# Altium PCB EP600_M_V1.7.2.PcbDoc
Units mil, origin at the board's own origin, x right, y up, seen from the top; angles counter-clockwise.
Board outline 8950 x 5110 mil, 2 copper layers (Top Layer, Bottom Layer); 84 components, 78 nets, 275 pads, 57 vias.
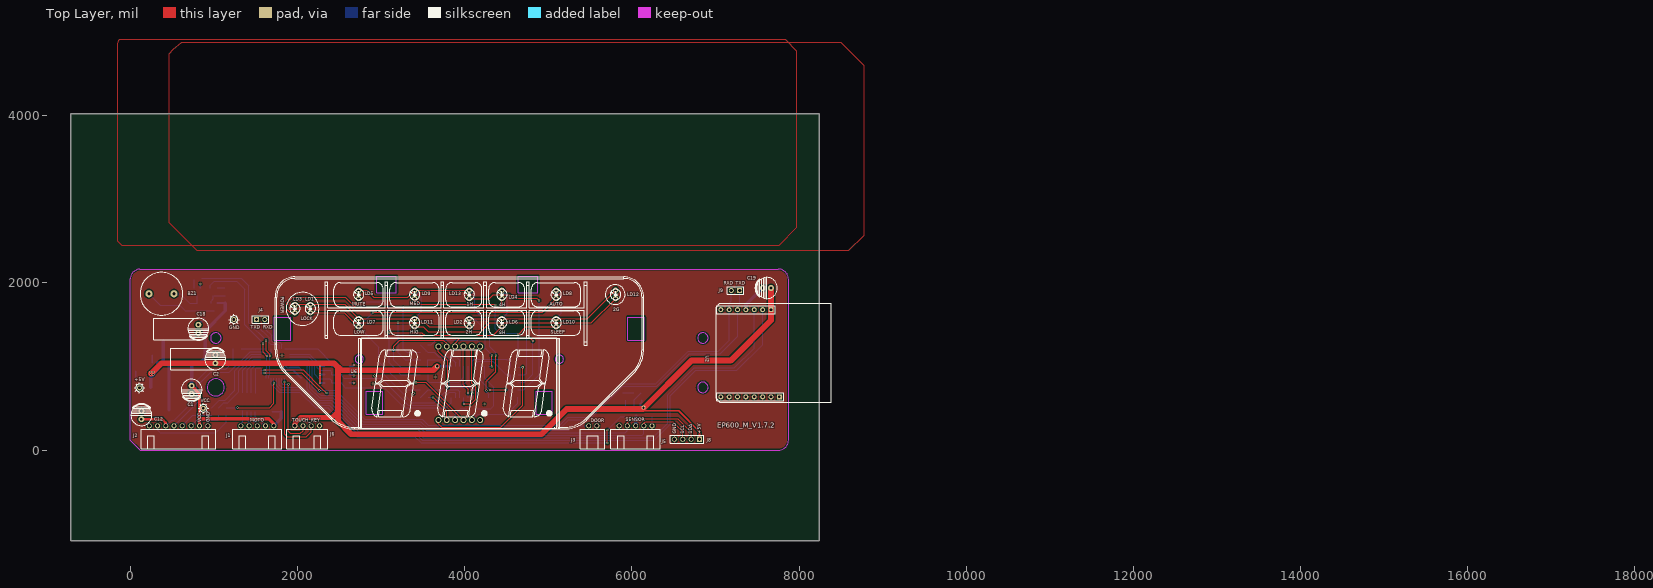
[diagram p0: Top Layer view]
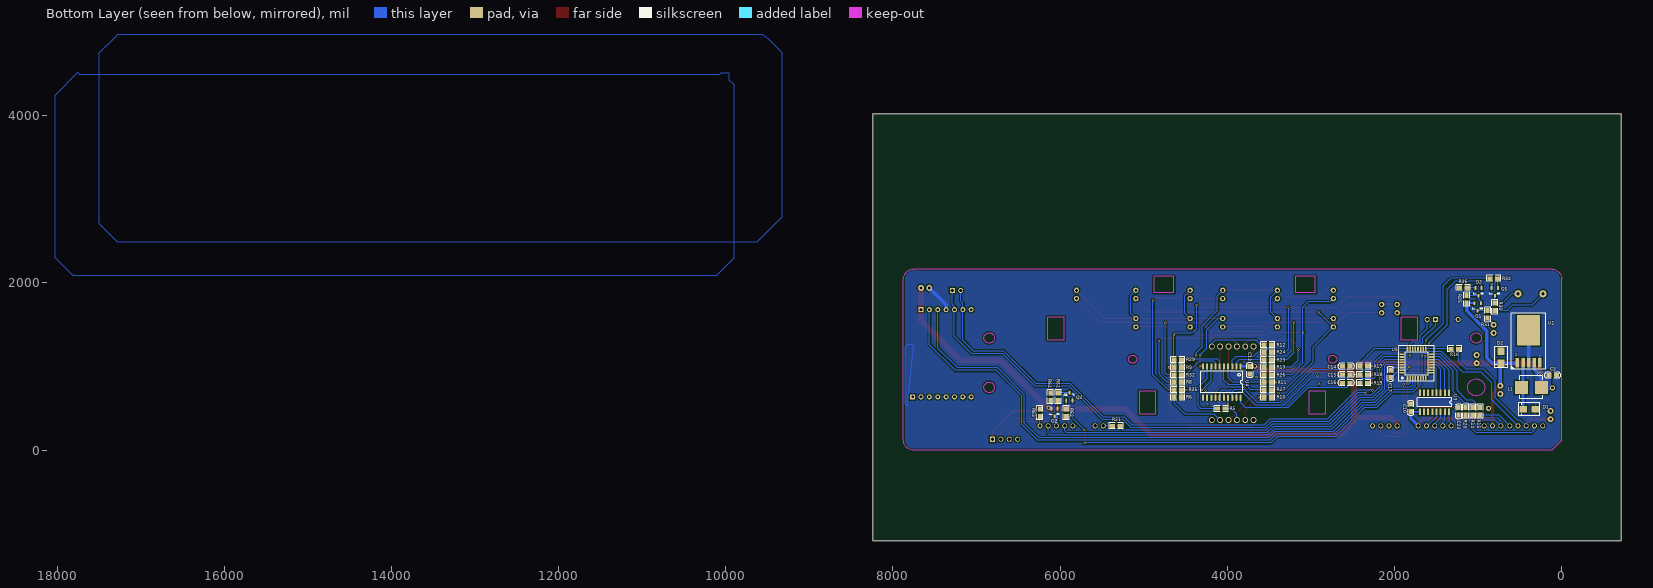
[diagram p1: Bottom Layer view, seen from below]

## Layer stack, top to bottom
Top Layer: signal copper 1.4
Dielectric: dielectric 12.6, FR-4, Dk 4.8
Bottom Layer: signal copper 1.4

## Board outline
-575,4025 8240,4025 8240,-1085 -710,-1085 -710,4025

## Design rules (kind name [scope] priority, off if disabled: settings)
Clearance [All] p1: gap=7
ComponentClearance [All] p1: gap=5 collisioncheckmode=3 verticalgap=10
PlaneConnect [All] p1: planeconnectstyle=Direct reliefexpansion=20 reliefentries=4 reliefconductorwidth=10 reliefairgap=10
PolygonConnect PolygonConnect_1 [InNet('+4V')] p1: connectstyle=Direct reliefconductorwidth=10 reliefentries=4 polygonreliefangle="90 Angle"
PolygonConnect [All] p2: connectstyle=Relief reliefconductorwidth=15 reliefentries=4 polygonreliefangle="90 Angle"
RoutingCorners [All] p1: cornerstyle=Round minsetback=100 maxsetback=100
RoutingVias [All] p1: holewidth=12 width=25 viastyle="Through Hole" minholewidth=12 minwidth=25 maxholewidth=28 maxwidth=50
SolderMaskExpansion [All] p1: expansion=4
TestPointUsage [All] p1: valid=0 allowmultiple=FALSE
Testpoint [All] p1: side=15 testpointundercomponent=TRUE minsize=40 maxsize=100 preferedsize=60 minholesize=0 maxholesize=40 preferedholesize=32 testpointgrid=1 style=1023 order=0123456789
Width [All] p1: maxlimit=100 minlimit=10 preferedwidth=10 minimp=50.000000 maximp=50.000000 favimp=50.000000
16 further rules are at their usual default settings.

## Classes and differential pairs
component class U_02-MCU: BZ1 C10 C12 C13 C14 C15 C16 C17 C18 C19 C23 J1 J2 J3 J4 J5 J6 J8 J9 LD1 LD2 LD3 LD4 LD5 LD6 LD7 LD8 LD9 LD10 LD11 LD12 LD13 Q1 Q2 Q3 Q4 Q5 R5 R6 R8 R9 R10 R11 R12 R13 R14 R15 R16 R17 R18 R19 R20 R21 R23 R24 R25 R26 R27 R29 R30 R31 R32 R34 R35 R36 R61 R62 R63 R64 U2 U3 U4 U5 U6
component class U_01-POWER: 4V +5V C1 C2 C3 D1 D2 GND L1 L2 U1 VCC

## Components (designator, comment, footprint, x,y, rotation, side; value= is the part's Value field where it differs from the comment)
+5V "T POINT A" TP_60_30 110,745 r0 top
BZ1 "BUZZER" BUZ1 223.43,1870 r0 top
C1 "100uF/35V" CE06150 734,770 r0 top
C2 "220uF/16V" "CE06150 - W"#1 1018,1040 r180 top
C3 "1uF" 0805_C 65,895 r0 bottom
C10 "0.1uF" 0805_C 1805,459.57 r90 bottom
C12 "100uF/16V" CE06150 133.35,370 r180 top
C13 "0.1uF" 0805_C 3731.07,1002.17 r270 bottom
C14 "100PF" 0805_C 2532.8,1004.57 r0 bottom
C15 "100PF" 0805_C 2532.8,904.57 r0 bottom
C16 "100PF" 0805_C 2532.8,804.57 r0 bottom
C17 "0.1uF" 0805_C 2049.17,866.65 r90 bottom
C18 "47uF/25V" "CE06150 - W"#2 815,1500 r180 top
C19 "220uF/16V" CE06150 7664.35,1939.37 r270 top
C23 "1nF" 0805_C 1234.35,419 r90 bottom
D1 "1N5824" SMB-DO-214AA_DIOM4436X24N 315,490 r0 bottom
D2 "SMBJ20A" SMB-DO-214AA_DIOM4436X24N 725,1184 r270 bottom
GND "T POINT A" TP_60_30 1240,1562.18 r0 top
J1 "CON5" XH2.54-5PW 1322.8,290 r0 top
J2 "CON8" XH2.54-8PW 227.8,290 r0 top
J3 "CON2" XH2.54-2PW 5483.35,290 r0 top
J4 "CON2" SIP2 1509.4,1562.18 r0 top
J5 "CON5" XH2.54-5PW 5848.35,290 r0 top
J6 "CON4" XH2.54-4PW 1967.8,290 r0 top
J8 "CON4" SIP4 6809.13,130 r180 top
J9 "CON2" SIP2 7289.35,1909.05 r180 top
L1 "33uH/1A" SMD_S7-7-5 480,750 r180 bottom
LD1 "WHITE" LED1 2153.54,1692.91 r180 top (schematic designator LD5)
LD2 "WHITE" LED1 4055.12,1523.62 r180 top (schematic designator LD13)
LD3 "WHITE" LED1 1968.5,1692.91 r180 top (schematic designator LD6)
LD4 "WHITE" LED1 4444.88,1862.2 r180 top (schematic designator LD10)
LD5 "WHITE" LED1 2732.28,1862.2 r180 top (schematic designator LD1)
LD6 "WHITE" LED1 4444.88,1523.62 r180 top (schematic designator LD11)
LD7 "WHITE" LED1 2732.28,1523.62 r180 top locked
LD8 "WHITE" LED1 5094.49,1862.2 r180 top (schematic designator LD12)
LD9 "WHITE" LED1 3401.57,1862.2 r180 top locked (schematic designator LD3)
LD10 "WHITE" LED1 5094.49,1523.62 r180 top (schematic designator LD8)
LD11 "WHITE" LED1 3401.57,1523.62 r180 top (schematic designator LD2)
LD12 "WHITE" LED1 5805,1862.2 r180 top
LD13 "WHITE" LED1 4055.12,1862.2 r180 top (schematic designator LD4)
Q1 "2N3906" SOT23 967.99,1759.14 r270 bottom
Q2 "S8550" SOT23 6029.65,495 r270 bottom
Q3 "2N3904" SOT23 957.99,1939.14 r270 bottom
Q4 "2N3904" SOT23 5927.05,594.13 r90 bottom
Q5 "2N3904" SOT23 762.99,1939.13 r270 bottom
R5 "220" 0805_R 4116.68,496.57 r180 bottom
R6 "220" 0805_R 4547,631.57 r0 bottom
R8 "220" 0805_R 4547,811.57 r0 bottom
R9 "220" 0805_R 4549.8,991.57 r0 bottom
R10 "220" 0805_R 3471.68,631.57 r0 bottom
R11 "220" 0805_R 3561.68,811.57 r180 bottom
R12 "220" 0805_R 3470.07,1261.57 r0 bottom
R13 "220" 0805_R 3561.07,991.57 r180 bottom
R14 "330" 0805_R 1061,508.57 r270 bottom
R15 "330" 0805_R 976,508.57 r270 bottom
R16 "330" 0805_R 1324.57,1210.59 r180 bottom
R17 "10K" 0805_R 2322.8,1004.57 r0 bottom
R18 "10K" 0805_R 2322.8,904.57 r0 bottom
R19 "10K" 0805_R 2322.8,804.57 r0 bottom
R20 "1k" 0805_R 1149.35,509 r270 bottom
R21 "1K" 0805_R 5283.35,290 r0 bottom
R23 "220" 0805_R 3562.07,1081.57 r180 bottom
R24 "220" 0805_R 3560.07,1171.57 r180 bottom
R25 "4.7K" 0805_R 1137.99,1759.13 r90 bottom
R26 "220" 0805_R 3561.68,901.57 r180 bottom
R27 "220" 0805_R 3561.68,721.57 r180 bottom
R29 "220" 0805_R 4549.8,1081.57 r0 bottom
R30 "4.7K" 0805_R 800.99,1668.27 r90 bottom
R31 "100" 0805_R 885.99,1578.27 r90 bottom
R32 "220" 0805_R 4549.8,901.57 r0 bottom
R34 "4.7K" 0805_R 766.5,2054.57 r0 bottom
R35 "220" 0805_R 4547,721.57 r0 bottom
R36 "4.7K" 0805_R 1221.5,1944.57 r180 bottom
R61 "4.7K" 0805_R 6022.05,684.13 r270 bottom
R62 "4.7K" 0805_R 5927.05,402.18 r90 bottom
R63 "0R" 0805_R 6242.05,402.18 r90 bottom
R64 "2K" 0805_R 6117.05,594.13 r90 bottom
U1 "LM2596S-5.0" TO-263-5 530,1045 r180 bottom
U2 "M26_MODULE" M26-MODULE 7064.35,1680.05 r270 top locked
U3 "ULN2004" SOP16 1347.8,684.57 r270 bottom
U4 "TM1620" SOP20 4066.07,814.17 r270 bottom
U5 "OB39R32T1W32VP" LQFP32 1734.78,1035.39 r180 bottom
U6 "SP410801K" LED08031 3936.07,799.21 r0 top locked
VCC "T POINT A" TP_60_30 875,500 r0 top

## Footprints (in the part's own frame and the unit in brackets; to place one, negate y for a bottom-side part, rotate by r counter-clockwise, add the part's x,y. Pads: shape width x height; smd on the part's side, far side on the other; paste and mask are expansions set on the pad)
0805_C [mil]
  rect 60x50 smd: 1(0,0) 2(90,0)
  silkscreen extent -48,-35 139,35
0805_R [mil]
  rect 60x50 smd: 1(0,0) 2(90,0)
  silkscreen extent -40,-35 130,35
BUZ1 [mm]
  round 2.2 hole 1: 1(0,0) 2(7.6,0)
  silkscreen extent -2.7,-6.5 10.3,6.5
CE06150 [mm]
  round 1.8 hole 0.8: 1(0,0) 2(0,-2.5)
  silkscreen extent -3.2,-4.65 3.2,1.95
"CE06150 - W"#1 [mm]
  round 1.8 hole 0.8: 1(0,0) 2(0,-2.5)
  silkscreen extent -3.2,-4.65 13.5,1.96
"CE06150 - W"#2 [mm]
  round 1.8 hole 0.8: 1(0,0) 2(0,2.5)
  silkscreen extent -3.2,-1.96 13.5,4.65
LED1 [mil]
  round 63 hole 35.43: A(0,50) K(0,-50)
  silkscreen extent -63,-64 63,62
LED08031 [mm]
  round 1.8 hole 1.2: 1(-6.35,-11.175) 2(-3.81,-11.175) 3(-1.27,-11.175) 4(1.27,-11.175) 5(3.81,-11.175) 6(6.35,-11.175) 7(6.35,11.175) 8(3.81,11.175) 9(1.27,11.175) 10(-1.27,11.175) 11(-3.81,11.175) 12(-6.35,11.175)
  silkscreen extent -29.65,-13.72 29.65,13.78
LQFP32 [mm]
  oval 0.5x1.5 smd: 1(-2.8,-4.45) 2(-2,-4.45) 3(-1.2,-4.45) 4(-0.4,-4.45) 5(0.4,-4.45) 6(1.2,-4.45) 7(2,-4.45) 8(2.8,-4.45) 17(2.8,4.45) 18(2,4.45) 19(1.2,4.45) 20(0.4,4.45) 21(-0.4,4.45) 22(-1.2,4.45) 23(-2,4.45) 24(-2.8,4.45)
  oval 1.5x0.5 smd: 9(4.45,-2.8) 10(4.45,-2) 11(4.45,-1.2) 12(4.45,-0.4) 13(4.45,0.4) 14(4.45,1.2) 15(4.45,2) 16(4.45,2.8) 25(-4.45,2.8) 26(-4.45,2) 27(-4.45,1.2) 28(-4.45,0.4) 29(-4.45,-0.4) 30(-4.45,-1.2) 31(-4.45,-2) 32(-4.45,-2.8)
  silkscreen extent -5.4,-5.4 5.4,5.4
M26-MODULE [mil]
  rect 60x60 hole 32: 1(0,600) 15(1043.31,700)
  round 60 hole 32: 2(0,500) 3(0,400) 4(0,300) 5(0,200) 6(0,100) 7(0,0) 8(1043.31,0) 9(1043.31,100) 10(1043.31,200) 11(1043.31,300) 12(1043.31,400) 13(1043.31,500) 14(1043.31,600)
  silkscreen extent -76,-58 1105,1320
SIP2 [mil]
  rect 60x60 hole 40: 1(0,0)
  round 60 hole 40: 2(100,0)
  silkscreen extent -50,-47 150,47
SIP4 [mil]
  rect 60x60 hole 40: 1(0,0)
  round 60 hole 40: 2(100,0) 3(200,0) 4(300,0)
  silkscreen extent -50,-47 350,47
SMB-DO-214AA_DIOM4436X24N [mm]
  rect 2.25x2.05 smd: 1(0,0) 2(3.65,0)
  silkscreen extent -1.35,-2 5,2, body extent -0.52,-1.97 4.17,1.97, height 2.44
SMD_S7-7-5 [mm]
  rect 4x4 smd: 1(0,0) 2(6,0)
  silkscreen extent -0.5,-3.5 6.5,3.5, body extent -0.5,-3.5 6.5,3.5, height 5
SOP16 [mil]
  oval 76x24 smd: 1(0,0)
  rect 76x24 smd: 2(0,-50) 3(0,-100) 4(0,-150) 5(0,-200) 6(0,-250) 7(0,-300) 8(0,-350) 9(225,-350) 10(225,-300) 11(225,-250) 12(225,-200) 13(225,-150) 14(225,-100) 15(225,-50) 16(225,0)
  silkscreen extent 60,-380 165,30
SOP20 [mil]
  oval 74x24 smd: 1(-188,225) 2(-188,175) 3(-188,125) 4(-188,75) 5(-188,25) 6(-188,-25) 7(-188,-75) 8(-188,-125) 9(-188,-175) 10(-188,-225) 11(188,-225) 12(188,-175) 13(188,-125) 14(188,-75) 15(188,-25) 16(188,25) 17(188,75) 18(188,125) 19(188,175) 20(188,225)
  silkscreen extent -130,-250 130,250
SOT23 [mm]
  rect 1.092x0.6 smd: 1(0,0) 2(0,-1.9) 3(2.308,-0.95)
  silkscreen extent 1.41,-2.45 1.85,0.55, body extent 0.45,-2.45 1.85,0.55, height 1.1
TO-263-5 [mm]
  rect 1.07x3 smd: 1(0,0) 2(1.7,0) 3(3.4,0) 4(5.1,0) 5(6.8,0)
  rect 7x9.4 smd: 6(3.41,9.878)
  silkscreen extent -1.8,-2 8.6,15, body extent 0,0 6.8,12.6, height 4.5
TP_60_30 [mil]
  round 60 hole 31.5: 1(0,0)
  silkscreen extent -64,-63 62,63
XH2.54-2PW [mil]
  round 60 hole 40: 1(0,0) 2(98.43,0)
  silkscreen extent -98,-276 192,-40, body extent -101,-276 192,-40, height 236
XH2.54-4PW [mil]
  round 60 hole 40: 1(0,0) 2(98.43,0) 3(196.85,0) 4(295.28,0)
  silkscreen extent -98,-276 392,-40, body extent -101,-276 392,-40, height 236
XH2.54-5PW [mil]
  round 60 hole 40: 1(0,0) 2(98.43,0) 3(196.85,0) 4(295.28,0) 5(393.7,0)
  silkscreen extent -98,-276 492,-40, body extent -101,-275 494,-40, height 236
XH2.54-8PW [mil]
  round 60 hole 40: 1(0,0) 2(98.43,0) 3(196.85,0) 4(295.28,0) 5(393.7,0) 6(500,0) 7(600,0) 8(700,0)
  silkscreen extent -98,-276 792,-40, body extent -101,-276 792,-40, height 236

## Part data
BZ1: "Buzzer"
C1 C2 C14 C18 C19: library part ECAP, "E-CAP"
C3: library part "Cap Semi", "Capacitor"
C10 C12 C13: library part CAP, "CAP"
C15 C16 C17: library part "Cap Semi_1", "Capacitor"
C23: library part Cap, "Capacitor"
D1: library part "DIODE SCHOTTKY"
D2: library part "D Zener", "TVS"
J1 J6: library part CON6, "Connector"
J2: library part CON2, "Connector"
J3 J4 J9: "Connector"
J5: library part "Header 4", "Header, 4-Pin"
L1: library part Inductor, "Inductor"
LD1 LD2 LD3 LD4 LD5 LD6 LD7 LD8 LD9 LD10 LD11 LD12 LD13: library part LED, "LED"
Q1 Q4 Q5: library part NPN
Q2 Q3: library part PNP
R5 R6 R8 R9 R10 R11 R12 R13 R14 R15 R19 R20 R21 R23 R24 R25 R26 R27 R29 R30 R31 R32 R34 R35 R36: library part R0.25W, "RESISTOR"
R16 R17 R18 R61 R62 R63 R64: library part RES1
U1: library part LM2596T-5.0
U2: library part M26-Module
U3: library part LM78M05

## Via types
v1: diameter 25, hole 12, Top Layer to Bottom Layer, tented both sides, 55 vias
v2: diameter 50, hole 28, Top Layer to Bottom Layer, tented both sides, 2 vias

## Nets (pads, with @x,y where several pads share a name; then routed paths per layer and width w, separated by ;. In a path a pad name is that pad's centre, name@x,y a point inside that pad or via, vN(x,y) a via of type N, cw(c..) or ccw(c..) an arc to the next point about the centre after c; other vN are vias at no path point)
+5V: +5V.1 C2.1 C3.2 C13.1 C17.1 C19.1 J6.1 J8.1 L1.2 Q2.2 R17.1 R18.1 R19.1 R64.1 U1.4 U2.1 U4.1 U5.31 | length 13117.3
  Top Layer w20: v1(1824.17,995.39) 1824.17,1025.39 ; 6120,470 6560,470 6808.35,221.65 6808.35,130.79 J8.1
  Top Layer w25: v1(2267.8,804.57) 2267.8,985.55
  Top Layer w60: J6.1 1967.8,320.07 2035.99,388.27 2410.99,388.27 2486.14,463.41
  Top Layer w70: 249.57,915.59 373.98,1040 2438.06,1040 2522.49,955.57 3624.46,955.57 v2(3671.07,1002.18) ; 2486.14,976.35 2486.14,348.27 2644.21,190.2 4918.55,190.2 5220.92,492.57 6133.78,492.57 6711.78,1070.57 7181.78,1070.57 7664.35,1553.14 C19.1
  Bottom Layer w20: v1(1824.17,995.39) 1862.91,956.65 1950.02,956.65 2040.02,866.66 C17.1 ; Q2.2 6104.45,559.58 6117.05,572.18 R64.1
  Bottom Layer w25: v1(2267.8,804.57) R19.1 ; v1(2267.8,904.57) R18.1 ; v1(2267.8,1004.57) R17.1
  Bottom Layer w30: v2(3671.07,1002.18) U4.1@3831.07,1002.18
  Bottom Layer w40: L1.2 243.78,873.78 329.21,959.21 U1.4 ; 6116.78,495.57 6125.78,495.57 v2(6138.78,508.57)
  other v1: 239.57,905.59 274.57,905.59 239.57,935.59 274.57,935.59
CLK: C15.1 R18.2 U4.19 U5.25 | length 2460.6
  Bottom Layer w10: U5.25 2146.43,1145.63 2166.49,1125.57 ; 2166.34,1125.42 2237.49,1054.27 2237.49,986.74 2270.61,953.62 2391.49,953.62 2412.8,932.31 R18.2 C15.1 2532.8,881.82 2554.61,860 2999.54,860 3324.97,534.57 3658.8,534.57 3813.8,689.57 3878.8,689.57 3891.07,677.29 U4.19 ; 2495.99,908.62 C15.1@2532.8,908.62
DIO: C14.1 R17.2 U4.18 U5.24 | length 2572.2
  Bottom Layer w10: U5.24 2243.64,1210.59 2412.8,1041.43 R17.2 ; 2412.8,1030.55 R17.2 ; U4.18 3941.07,696.29 3917.8,719.57 3790.8,719.57 3635.8,564.57 3372.39,564.57 2978.34,958.62 2549.73,958.62 2532.8,975.55 C14.1 R17.2
FG: C23.2 R20.1 U5.5 | length 890.6
  Top Layer w10: v1(1284.35,509) 1667.35,509 1719.03,560.68 v1(1719.03,800.2)
  Bottom Layer w10: R20.1 v1(1284.35,509) ; v1(1719.03,800.2) U5.5
GND: C1.2 C2.2 C3.1 C10.2 C12.2 C13.2 C14.2 C15.2 C16.2 C17.2 C18.2 C19.2 C23.1 D1.1 D2.1 GND.1 J2.8 J3.2 J5.1 J6.4 J8.4 Q4.2 Q5.2 R36.1 R63.2 U1.3 U1.5 U1.6 U2.4 U2.7 U2.8 U2.9 U2.10 U2.11 U2.12 U2.13 U2.14 U2.15 U3.8 U4.12 U4.15 U5.30 | length 1325.1
  Bottom Layer w10: 1821,1045 1877.85,988.15 U5.30
  Bottom Layer w20: 65,845 65,945 ; U1.5 262.28,1134.68 ; Q5.2 v1(837.8,1989.13) ; U5.30 2017.68,988.15 C17.2 ; C16.2 v1(2674.57,804.57) ; C15.2 2661.57,904.57 v1(2674.57,891.57) ; C14.2 2660.57,1004.57 v1(2674.57,1018.57) ; U4.15 v1(4091.07,680.96)
  Bottom Layer w40: U1.3 U1.6@396.14,1301.14 ; U2.4 7364.35,1737.79 C19.2 ; C19.2@7574.47,1939.37 C19.2@7574.92,1939.37
  other v1: 4235,550 3390,680 2903.35,795 3650,875 2920.49,889.57 1814.98,1132.13
GRID1: U4.17 U6.8 | length 892.6
  Top Layer w10: v1(3991.07,552.17) 4079.1,552.17 4135.19,608.27 4135.19,753.27 4086.07,802.39 U6.8
  Bottom Layer w10: v1(3991.07,552.17) U4.17
GRID2: U4.16 U6.9 | length 635.8
  Top Layer w10: U6.9 3986.07,783.27 4041.07,728.27 v1(4041.07,680.96)
  Bottom Layer w10: U4.16 v1(4041.07,680.96)
GRID3: U4.14 U6.12 | length 973.5
  Top Layer w10: U6.12 3686.07,1177.39 3795.8,1067.67 v1(3795.8,749.57)
  Bottom Layer w10: v1(3795.8,749.57) 4088.67,749.57 4141.68,696.57 4141.68,626.78 U4.14
GRID5: LD1.K LD3.K LD5.K LD7.K LD9.K LD11.K LD13.K U4.11 | length 4780.5
  Top Layer w10: LD3.K 2562.99,1742.91 LD7.K LD11.K ; LD5.K 2829.5,1912.2 2914.13,1827.57 3316.94,1827.57 LD9.K LD13.K ; v1(4259,715.44) 4259,825.44 4374,940.44 v1(4374,1130.44)
  Bottom Layer w10: LD11.K 3482.09,1654.13 3482.09,1831.69 LD9.K ; LD13.K 4119,1848.33 4119,1670.44 4299,1490.44 4299,1237.17 4374,1162.17 v1(4374,1130.44) ; v1(4259,715.44) 4259,700.44 4291.07,668.36 U4.11
GRID6: LD2.K LD4.K LD6.K LD8.K LD10.K LD12.K U4.10 | length 3427.4
  Top Layer w10: LD2.K LD10.K@5096.85,1573.62 ; v1(4326.07,1002.17) v1(4326.07,1130.44) ; LD10.K 5466.42,1573.62 LD12.K
  Bottom Layer w10: LD2.K 4115.81,1573.62 4249,1440.44 4249,1219.25 4326.07,1142.17 v1(4326.07,1130.44) ; U4.10 v1(4326.07,1002.17) ; LD6.K 4507.8,1636.54 4507.8,1849.29 LD4.K ; LD10.K 5156.5,1635.63 5156.5,1850.2 LD8.K
IIC_SCL: J6.3 U5.1 | length 1100.8
  Top Layer w10: v1(1845.02,815.2) 1845.02,189.24 1875.99,158.27 2105.99,158.27 2164.65,216.92 J6.3
  Bottom Layer w10: v1(1845.02,815.2) U5.1
IIC_SDA: J6.2 U5.2 | length 958.2
  Top Layer w10: v1(1890.8,787.57) 1890.8,225.96 1913.49,203.27 2035.99,203.27 2066.22,233.5 J6.2
  Bottom Layer w10: U5.2 1813.52,799.85 1825.8,787.57 v1(1890.8,787.57)
ION: R15.1 U5.16 | length 986
  Bottom Layer w10: R15.1 1062.74,595.31 1133.66,595.31 1252.57,714.23 1252.57,950.73 1335.46,1033.61 1447.48,1145.63 U5.16
MOT_1: U3.1 U5.14 | length 536.2
  Bottom Layer w10: U3.1 1347.8,956.87 1473.57,1082.64 U5.14
MOT_2: U3.2 U5.13 | length 476.1
  Bottom Layer w10: U3.2 1397.8,961.87 1487.07,1051.14 U5.13
MOT_3: U3.3 U5.12 | length 416.2
  Bottom Layer w10: U3.3 1447.8,967.32 1469.18,988.7 1500.12,1019.65 U5.12
MOT_4: U3.4 U5.11 | length 356.4
  Bottom Layer w10: U3.4 1498.35,685.12 1498.35,973.33 1513.17,988.15 U5.11
NetBZ1_1: BZ1.1 Q1.3 R30.1 R31.2 | length 866.8
  Bottom Layer w10: BZ1.1 357.83,1735.59 589.57,1735.59 656.89,1668.27 Q1.3 Q1.3@1004.53,1669.13
NetBZ1_2: BZ1.2 Q5.3 R30.2 | length 415.2
  Bottom Layer w10: BZ1.2 599.26,1870 710.39,1758.87 R30.2@800.39,1758.87 ; R30.2@800.39,1758.27 R30.2 R30.2@800.39,1758.87 ; Q5.3@800.39,1844.13 Q5.3@800.99,1844.13 ; Q5.3 R30.2@800.39,1758.87
NetC12_1: C12.1 J2.3 R16.2 | length 1745.9
  Top Layer w30: C12.1 380,370 424.65,325.35 J2.3
  Bottom Layer w10: J2.3 494.65,360 528.35,360 795,626.65 795,830 930,965 1143.35,965 1234.57,1056.22 R16.2
NetC18_1: C18.1 R31.1 | length 110.8
  Bottom Layer w20: C18.1 885.99,1570.99 R31.1 R31.1@882.84,1578.27
NetD1_2: D1.2 L1.1 U1.2 | length 560.6
  Bottom Layer w40: D1.2@463.07,484.37 U1.2
NetJ1_1: J1.1 U3.16 | length 187.9
  Bottom Layer w10: J1.1 1322.8,318.27 1345.99,341.46 U3.16@1345.99,468.27
NetJ1_2: J1.2 U3.15 | length 179.3
  Bottom Layer w10: U3.15 1397.8,356.46 1421.22,333.04 J1.2
NetJ1_3: J1.3 U3.14 | length 199.3
  Bottom Layer w10: U3.14 1447.8,386.46 1519.65,314.61 J1.3
NetJ1_4: J1.4 U3.13 | length 224.5
  Bottom Layer w10: U3.13 1497.8,401.46 1609.26,290 J1.4
NetJ2_2: J2.2 R20.2 | length 1027.3
  Bottom Layer w10: J2.2 326.22,237.87 359.1,205 1020.35,205 1149.35,334 R20.2
NetJ2_5: J2.5 R15.2 | length 407.8
  Bottom Layer w10: J2.5 750.07,418.57 R15.2
NetJ2_6: J2.6 R14.2 | length 413.9
  Bottom Layer w10: J2.6 792.8,355 1044.35,355 1061,371.65 R14.2
NetJ3_1: J3.1 R21.2 | length 110
  Bottom Layer w10: R21.2 J3.1
NetJ5_3: J5.3 Q2.3 | length 117.8
  Bottom Layer w40: J5.3 6045.2,395.2 6054.14,404.13
NetJ5_5: J5.5 R63.1 | length 112.2
  Bottom Layer w10: J5.5 R63.1
NetLD1_A: LD1.A LD2.A R23.2 | length 2634.7
  Top Layer w10: LD1.A 2559.45,1642.91 2677.8,1524.57 3527.8,1524.57 3578.74,1473.62 LD2.A
  Bottom Layer w10: v1(3202.8,1524.57) 3202.8,1165.67 3286.9,1081.57 R23.2
NetLD3_A: LD3.A LD4.A R24.2 | length 3641.2
  Top Layer w10: LD3.A 1912.33,1642.91 1872.07,1683.17 1872.07,1757.17 1941.07,1826.17 2573.07,1826.17 2695.07,1704.17 4414.07,1704.17 4444.88,1734.99 LD4.A
  Bottom Layer w10: v1(3266.07,1704.17) 3266.07,1213.27 3307.77,1171.57 R24.2
NetLD5_A: LD5.A LD6.A R26.2 | length 2913.7
  Top Layer w10: v1(3095.07,1406.57) 3484.68,1406.57 3519.68,1371.57 4342.83,1371.57 LD6.A
  Bottom Layer w10: LD5.A 2771.92,1772.57 3034.13,1772.57 3095.07,1711.63 3095.07,1044.93 3238.43,901.57 R26.2
NetLD7_A: LD7.A LD8.A R27.2 | length 3653.5
  Top Layer w10: v1(2905.07,1646.57) 4928.85,1646.57 LD8.A
  Bottom Layer w10: v1@2905.15,1646.49 LD7.A 2975.07,1230.84 2975.07,1059.93 3313.43,721.57 R27.2
NetLD9_A: LD9.A LD10.A R29.2 | length 2375.2
  Top Layer w10: LD9.A 3467.21,1746.57 4356.68,1746.57 v1(4366.68,1736.57) ; v1(4639.8,1380.57) 4732.85,1473.62 LD10.A
  Bottom Layer w10: v1(4366.68,1736.57) 4366.68,1453.2 4407.85,1412.02 4423.54,1396.34 4624.02,1396.34 v1(4639.8,1380.57) R29.2
NetLD11_A: LD11.A LD12.A R32.2 | length 3303.1
  Top Layer w10: LD11.A 3504.62,1473.62 3561.68,1416.57 4191.68,1416.57 4298.68,1523.57 5516.36,1523.57 LD12.A
  Bottom Layer w10: R32.2 4721.68,901.57 4741.68,921.57 v1(4741.68,1523.57)
NetLD13_A: LD13.A R35.2 | length 2100.6
  Top Layer w10: LD13.A 4291.31,1812.2 4340.68,1861.57 4537.68,1861.57 4581.68,1817.57 4863.68,1817.57 v1(4889.68,1791.57)
  Bottom Layer w10: R35.2 4708.67,721.57 4889.68,902.57 v1(4889.68,1791.57)
NetQ1_1: Q1.1 Q3.3 R25.2 | length 233.4
  Bottom Layer w10: Q1.1 967.99,1782.99 995.39,1810.39 Q3.3 ; Q3.3@1005.39,1848.27 1006.26,1849.13 R25.2
NetQ2_1: Q2.1 R61.2 R64.2 | length 233.8
  Bottom Layer w10: R61.2 R64.2@6112.05,684.13 ; Q2.1 R61.2@6029.65,601.54
NetQ3_2: Q3.2 R36.2 | length 93.7
  Bottom Layer w10: Q3.2@1037.8,1944.57 R36.2
NetQ4_1: Q4.1 R62.2 | length 102
  Bottom Layer w10: R62.2 Q4.1
NetQ4_3: Q4.3 R61.1 | length 132.8
  Bottom Layer w10: Q4.3 5890.51,684.13 R61.1
NetQ5_1: Q5.1 R34.1 | length 100
  Bottom Layer w10: Q5.1 R34.1@762.99,2039.13
NetR5_2: R5.2 U6.3 | length 273.2
  Bottom Layer w10: U6.3@3886.07,392.96 U6.3 3886.07,430.96 3951.68,496.57 R5.2
NetR6_2: R6.2 U6.5 | length 703.7
  Bottom Layer w10: U6.5 4158.39,431.57 4505.3,431.57 4637,563.27 R6.2
NetR8_2: R8.2 U6.10 | length 1623.5
  Top Layer w10: U6.10 3886.07,1279.15 3942.49,1335.57 4786.68,1335.57 v1(4816.68,1305.57)
  Bottom Layer w10: R8.2 4720.07,811.57 4816.68,908.17 v1(4816.68,1305.57)
NetR9_2: R9.2 U6.1 | length 1685.3
  Top Layer w10: U6.1 3686.07,317.17 3727.68,275.57 4432.68,275.57 4694.68,537.57 v1(4694.68,991.57)
  Bottom Layer w10: R9.2 v1(4694.68,991.57)
NetR10_2: R10.2 U6.2 | length 403.3
  Top Layer w10: v1(3620.46,631.57) 3626.68,631.57 3786.07,472.17 U6.2
  Bottom Layer w10: R10.2 v1(3620.46,631.57)
NetR11_2: R11.2 U6.4 | length 811.7
  Top Layer w10: v1(3416.68,811.57) 3533.76,811.57 U6.4
  Bottom Layer w10: v1(3416.68,811.57) R11.2
NetR12_2: R12.2 U6.7 | length 702.2
  Bottom Layer w10: R12.2 3599.8,1261.57 3654.8,1316.57 4145.07,1316.57 4186.07,1275.57 U6.7
NetR13_2: R13.2 U6.11 | length 1205.3
  Top Layer w10: v1(3150.07,1201.57) 3150.07,1241.57 3225.07,1316.57 3745.07,1316.57 3786.07,1275.57
  Bottom Layer w10: v1(3150.07,1201.57) 3150.07,1076.57 3235.07,991.57 R13.2
PWRKEY: U2.3 U5.3 | length 7130.5
  Bottom Layer w10: U5.3 1782.02,778.39 1809.34,751.07 2054.34,751.07 2241.34,564.07 2392.28,564.07 2735.78,220.57 3430.78,220.57 3505.78,145.57 6252.13,145.57 6429.13,322.57 6429.13,662.57 6749.13,982.57 7226.86,982.57 7464.35,1220.05 U2.3
PWRON: U2.2 U5.4 | length 7269.8
  Bottom Layer w10: U5.4 1750.53,767.46 1796.92,721.07 2041.92,721.07 2228.92,534.07 2379.85,534.07 2723.35,190.57 3418.35,190.57 3493.35,115.57 6267.13,115.57 6459.13,307.57 6459.13,650.14 6761.56,952.57 7254.35,952.57 7564.35,1262.57 U2.2
SCL: J5.4 J8.3 U5.29 | length 5493
  Top Layer w10: J5.4 6143.62,323.62 6160,340 6489.13,340 6609.13,220 J8.3
  Bottom Layer w10: U5.29 2102.41,1019.65 2117.49,1004.57 2117.49,730.35 2253.77,594.07 2408.85,594.07 2752.35,250.57 3440.35,250.57 3515.35,175.57 6124.92,175.57 6143.62,194.27 J5.4
SDA: J5.2 J8.2 U5.28 | length 5601
  Top Layer w10: J5.2@5946.77,277.57 5946.77,326.77 5995,375 6549.13,375 6709.13,215 J8.2
  Bottom Layer w10: U5.28 2113.34,1051.14 2147.49,1016.99 2147.49,742.77 2266.2,624.07 2421.28,624.07 2764.78,280.57 3452.78,280.57 3527.78,205.57 5923.07,205.57 5946.77,229.27 J5.2
SEG1: R13.1 R23.1 U4.2 | length 478.8
  Bottom Layer w10: R13.1 3561.07,1080.57 R23.1 3857,1081.57 3891.07,1047.5 U4.2
SEG2: R12.1 R24.1 U4.3 | length 655.9
  Bottom Layer w10: R12.1 R24.1 ; R24.1@3535.07,1191.57 3540.07,1191.57 R24.1 ; U4.3 3941.07,1077.5 3901.39,1117.17 3691.07,1117.17 3636.68,1171.57 R24.1
SEG3: R11.1 R26.1 U4.4 | length 676.5
  Bottom Layer w10: R11.1@3561.68,810.9 3932.8,810.9 3991.07,869.17 U4.4 ; R11.1 R26.1
SEG4: R10.1 R27.1 U4.5 | length 824.5
  Bottom Layer w10: R10.1 3477.67,631.57 3566.07,719.97 3564.47,721.57 3718.46,721.57 3776.07,779.17 3986.07,779.17 4041.07,834.17 U4.5
SEG5: R9.1 R29.1 U4.6 | length 627.3
  Bottom Layer w10: U4.6 4091.07,1060.96 4116.68,1086.57 4496.07,1086.57 4501.07,1081.57 R29.1 ; R29.1@4544.8,1086.57 R29.1 ; R9.1 R29.1
SEG6: R8.1 R32.1 U4.7 | length 613.5
  Bottom Layer w10: U4.7 4141.07,1040.96 4161.68,1061.57 4336.07,1061.57 4496.07,901.57 R32.1 4549.8,814.36 R8.1
SEG7: R6.1 R35.1 U4.8 | length 661.7
  Top Layer w10: v1(4301.68,721.57) v1(4486.68,721.57)
  Bottom Layer w10: U4.8 4191.07,832.17 v1(4301.68,721.57) ; v1(4486.68,721.57) R35.1 R6.1
SEG8: R5.1 U4.9 | length 757.4
  Bottom Layer w10: R5.1 4310.68,496.57 4345.68,531.57 4345.68,752.57 4241.07,857.17 U4.9
SENS_P: R62.1 U5.6 | length 4854
  Top Layer w10: v1(5708.35,85.57) v1(5708.35,240.57)
  Bottom Layer w10: U5.6 1687.54,788.02 1784.49,691.07 2029.49,691.07 2216.49,504.07 2368.49,504.07 2391.49,481.07 ; 2370.36,501.14 2710.93,160.57 3405.93,160.57 3480.93,85.57 v1(5708.35,85.57) ; v1(5708.35,240.57) 5869.95,402.18 R62.1
SPK+: Q3.1 U5.8 | length 1685.4
  Top Layer w10: v1(1589.78,1276.68) 1589.78,1168.9 v1(1634.78,1123.9)
  Bottom Layer w10: Q3.1 957.99,1971.06 1006.5,2019.57 1274.4,2019.57 1368.78,1925.19 1368.78,1497.68 v1(1589.78,1276.68) v1@1585.68,1276.68 ; U5.8 1624.54,895.76 1634.78,906 v1(1634.78,1123.9)
SPK-: R34.2 U5.7 | length 1816.8
  Top Layer w10: v1(1624.17,1311.68) 1624.17,1189.17 1669.17,1144.17 v1(1669.17,1123.9)
  Bottom Layer w10: R34.2 1238.35,2054.57 ; 1238.35,2055 1328.35,2055 1420,1963.35 1420,1515.85 v1(1624.17,1311.68) v1@1620.68,1311.68 ; U5.7 1656.04,890.13 1669.17,903.27 v1(1669.17,1123.9)
STB: C16.1 R19.2 U4.20 U5.26 | length 2376.4
  Bottom Layer w10: U5.26 2135.2,1114.13 2207.49,1041.85 2207.49,906.62 2257.49,856.62 2388.49,856.62 2412.8,832.31 R19.2 C16.1 2532.8,785.55 2573.35,745 3037.11,745 3277.54,504.57 3780.64,504.57 3841.07,565 U4.20
UART2_RXD: J4.2 U5.23 | length 488.2
  Bottom Layer w10: J4.2 1609.4,1452.74 1689.57,1372.57 1689.57,1303.57 1703.57,1289.57 1792.52,1289.57 1813.52,1268.57 U5.23
UART2_TXD: J4.1 U5.22 | length 516.3
  Bottom Layer w10: J4.1 1509.4,1495.74 1659.57,1345.57 1659.57,1283.57 1678.57,1264.57 1767.02,1264.57 1782.02,1249.57 U5.22
UART_RXD: J9.2 U2.6 U5.9 | length 6895.8
  Top Layer w10: v1(1604.58,923.16) 2052.4,923.16 v1@2261.99,713.57
  Bottom Layer w10: U5.9 v1@1602.58,925.16 ; v1(2262.49,714.07) 2458.55,714.07 2802.05,370.57 3490.05,370.57 3565.05,295.57 5134.91,295.57 5234.34,395 5478.78,395 5878.98,795.2 6283.98,795.2 6674.35,1185.57 7034.35,1185.57 7164.35,1315.56 7164.35,1759.25 7189.35,1784.25 J9.2 ; J9.2@7173.35,1904.05 J9.2@7178.35,1909.05
UART_TXD: J9.1 U2.5 U5.10 | length 7002
  Top Layer w10: v1(1604.58,958.65) 2067.1,958.65 2284.19,741.57 2341.69,684.07 v1(2349.49,684.07)
  Bottom Layer w10: U5.10 v1@1602.58,956.65 ; v1(2349.49,684.07) 2445.99,684.07 2520.49,609.57 ; 2520.56,609.64 2789.63,340.57 3477.63,340.57 3552.63,265.57 5147.34,265.57 5246.77,365 5491.21,365 5891.41,765.2 6296.41,765.2 6686.78,1155.57 7058.92,1155.57 7264.35,1361 7264.35,1717.83 7289.35,1742.83 J9.1
UV: R14.1 U5.15 | length 897
  Bottom Layer w10: R14.1 1118.81,566.37 1164.72,566.37 1295,696.65 1295,948.61 1460.52,1114.13 U5.15
UV电流检测: J2.4 U5.19 | length 1707.9
  Bottom Layer w10: J2.4 835,601.93 835,805 960,930 1184.74,930 1433.68,1178.94 1589.21,1178.94 1614.21,1153.94 1669.21,1153.94 1687.54,1172.26 U5.19
VCC: C1.1 C10.1 D2.2 J1.5 J2.7 Q1.2 R25.1 U1.1 U3.9 VCC.1 | length 3401.4
  Top Layer w40: C1.1 827.8,676.2 J2.7 ; 827.8,343.82 859.57,375.59 1654.57,375.59 1716.5,313.66 J1.5 ; 845,500 VCC.1
  Bottom Layer w20: Q1.2 R25.1 ; U3.9@1698.23,460 1805,460 C10.1 1805,408.83 1805,406.67
  Bottom Layer w40: U1.1 535,1040 718.7,1040 725,1046.3 734,1037.3 C1.1 C1.1@725,779 ; D2.2@731,1040.3 833.35,1040.3 898.35,1105.3 898.35,1425 1137.99,1664.64 R25.1 ; J1.5 1805,378.5 1805,408.83 C10.1
VSP: R16.1 U5.17 | length 300
  Bottom Layer w10: R16.1 U5.17
仓门检测: R21.1 U5.27 | length 3980.2
  Bottom Layer w10: U5.27 2124.27,1082.64 2177.49,1029.42 2177.49,755.07 2210.49,722.07 ; 2180.49,752.2 2278.62,654.07 2433.7,654.07 2777.2,310.57 3465.2,310.57 3540.2,235.57 5247.62,235.57 5283.35,271.3 R21.1 ; R21.1@5287.05,271.3 R21.1@5287.05,290.57
pads on no net: J2.1 U3.5 U3.6 U3.7 U3.10 U3.11 U3.12 U4.13 U5.18 U5.20 U5.21 U5.32 U6.6

## Polygon pours and split planes (outlines as drawn)
GND on Top Layer "Top Layer-No Net 2" (solid, remove dead copper, pour order 1000): -132.36,2294.71 7792.64,2294.71 7937.64,2149.71 7937.64,79.71 7797.64,-60.29 27.64,-60.29 -287.36,254.71 -287.36,2159.71 -197.36,2249.71
GND on Bottom Layer "Bottom Layer-No Net 4" (solid, remove dead copper, pour order 1001): -295.65,2387.18 7699.35,2387.18 7909.35,2177.18 7909.35,77.18 7664.35,-167.82 -40.65,-167.82 -330.65,122.18 -330.65,2347.18 -315.65,2362.18
+5V on Bottom Layer "Bottom Layer-No Net 3" (solid, remove dead copper, pour order 1000): 280.1,950.59 292.17,950.59 320,923.79 320,724.02 290.48,695.59 160.71,695.59 129.57,725.59 129.57,905.59 129.57,930.59 150.33,950.59
GND on Bottom Layer "Bottom Layer-No Net 2" (solid, remove dead copper, shelved, pour order 1001): 9492.8,4922.08 9327.8,4757.08 9327.8,4182.08 9327.8,2787.08 9627.8,2487.08 17272.8,2487.08 17492.8,2707.08 17492.8,4752.08 17292.8,4952.08 17272.8,4972.08 9562.8,4972.08
GND on Top Layer "Top Layer-No Net 1" (solid, remove dead copper, shelved, pour order 1000): 616.33,4878.71 8496.33,4878.71 8771.33,4603.71 8771.33,2563.71 8591.33,2383.71 801.33,2383.71 466.33,2718.71 466.33,4743.71 516.33,4793.71
no net on Bottom Layer "Bottom Layer-No Net 1" (solid, remove dead copper, shelved): 7752.6,1260.32 7827.6,1260.32 7857.6,1232.24 7857.6,1204.16 7857.6,558.39 7827.6,530.32
GND on Bottom Layer "Bottom Layer-No Net" (solid, remove dead copper, shelved, pour order 1001): 9961.66,4432.65 9906.66,4377.65 9906.66,4172.65 9906.66,2297.65 10116.66,2087.65 17806.66,2087.65 18021.66,2302.65 18021.66,4247.65 17751.66,4517.65 17731.66,4497.65 10071.66,4497.65 10056.66,4512.65 9961.66,4512.65
GND on Top Layer "Top Layer-No Net" (solid, remove dead copper, shelved, pour order 1000): -154.59,4862.48 -154.59,2502.48 -104.59,2452.48 7760.41,2452.48 7975.41,2667.48 7975.41,4772.48 7840.41,4907.48 -134.59,4907.48 -144.59,4897.48

## Keep-outs
Keep-Out Layer:
  circle w9.84: c5133.45,1087.71 r49.21
  circle w9.84: c2739.75,1087.71 r49.21
  circle w9.84: c1023.22,1340.89 r62.99
  circle w9.84: c1023.22,750.34 r102.36
  circle w9.84: c6849.99,1340.89 r62.99
  circle w9.84: c6849.99,750.34 r62.99
  lines w9.84: 0,2051.15 cw(c120.08,2045.28) 114.21,2165.36 ; 0,2051.18 0,118.11 118.11,0 7755.91,0 ccw(c7755.91,118.11) 7874.02,118.11 7874.02,2043.31 ccw(c7754.24,2045.58) 7751.94,2165.35 114.17,2165.35 ; 4853.93,430.23 5050.78,430.23 5050.78,705.82 4853.93,705.82 ; 1724.01,1316.85 1920.86,1316.85 1920.86,1592.44 1724.01,1592.44 1724.01,1316.85 ; 2822.43,430.23 3019.28,430.23 3019.28,705.82 2822.43,705.82 2822.43,430.23 ; 2946.96,1882.99 3183.18,1882.99 3183.18,2079.84 2946.96,2079.84 2946.96,1882.99 ; 4639.88,1882.99 4876.1,1882.99 4876.1,2079.84 4639.88,2079.84 4639.88,1882.99 ; 5952.35,1316.85 6149.2,1316.85 6149.2,1592.44 5952.35,1592.44 5952.35,1316.85
  lines w10: 4853.93,430.23 4853.93,705.82

## Silkscreen, mask and mechanical layers (free items; w line width, h text height)
Top Overlay:
  drawing of 182 lines, arcs and shapes, not listed
  text "RXD" at 7099.57,1975.59 h40
  text "TXD" at 7244.57,1975.59 h40
  text "POWER" at 1803,1832 h40 r270
  text "MED" at 3342,1732 h40
  text "MUTE" at 2657,1729 h40
  text "1H" at 4025,1728 h40
  text "AUTO" at 5019,1727 h40
  text "4H" at 4415,1724 h40
  text "2G" at 5775,1660 h40
  text "LOCK" at 2040,1555 h40
  text "TXD" at 1439.4,1452.18 h40
  text "RXD" at 1589.4,1452.18 h40
  text "LOW" at 2679,1391 h40
  text "SLEEP" at 5029,1391 h40
  text "HIG" at 3352,1390 h40
  text "2H" at 4013,1390 h40
  text "8H" at 4411,1388 h40
  text "SENSOR" at 5928.35,345.57 h40
  text "MOTO" at 1435,340 h40
  text "TOUCH_KEY" at 1936.68,339.07 h40
  text "VCC" at 849.57,335.59 h40 r90
  text "DOOR" at 5509.57,335.59 h40
  text "GND" at 950,335 h40 r90
  text "EP600_M_V1.7.2" at 7020,270 h60
  text "GND" at 6528.35,195.57 h40 r90
  text "SCL" at 6628.35,195.57 h40 r90
  text "SDA" at 6723.35,195.57 h40 r90
  text "+5V" at 6826.68,194.07 h40 r90
Mechanical 1:
  circle w9.84: c2739.75,1087.71 r49.21
  circle w9.84: c1023.22,1340.89 r62.99
  circle w9.84: c1023.22,750.34 r102.36
  circle w9.84: c5133.45,1087.71 r49.21
  circle w9.84: c6849.99,1340.89 r62.99
  circle w9.84: c6849.99,750.34 r62.99
  lines w9.84: 0,2051.15 cw(c120.08,2045.28) 114.21,2165.36 ; 0,2051.18 0,118.11 118.11,0 7755.91,0 ccw(c7755.91,118.11) 7874.02,118.11 7874.02,2043.31 ccw(c7754.24,2045.58) 7751.94,2165.35 114.17,2165.35 ; 4853.93,430.23 5050.78,430.23 5050.78,705.82 4853.93,705.82 ; 1724.01,1316.85 1920.86,1316.85 1920.86,1592.44 1724.01,1592.44 1724.01,1316.85 ; 2822.43,430.23 3019.28,430.23 3019.28,705.82 2822.43,705.82 2822.43,430.23 ; 2946.96,1882.99 3183.18,1882.99 3183.18,2079.84 2946.96,2079.84 2946.96,1882.99 ; 4639.88,1882.99 4639.88,2079.84 4876.1,2079.84 4876.1,1882.99 4639.88,1882.99 ; 5952.35,1316.85 5952.35,1592.44 6149.2,1592.44 6149.2,1316.85 5952.35,1316.85
  lines w10: 4853.93,430.23 4853.93,705.82
Drill Drawing:
  lines w9.84: 1724.01,1316.85 1731.88,1316.85 ; 1724.01,1592.44 1731.88,1592.44 ; 2946.96,2071.96 2946.96,2079.84 ; 4639.88,2071.96 4639.88,2079.84 ; 4876.1,2071.96 4876.1,2079.84 ; 6121.33,1316.85 6129.2,1316.85 ; 6141.33,1592.44 6149.2,1592.44

## Text inside footprints (layer, text, board x,y; h text height)
U1: Bottom Overlay "1" at 555,1130 h30